# EAGLE board untitled (EAGLE 6.3)
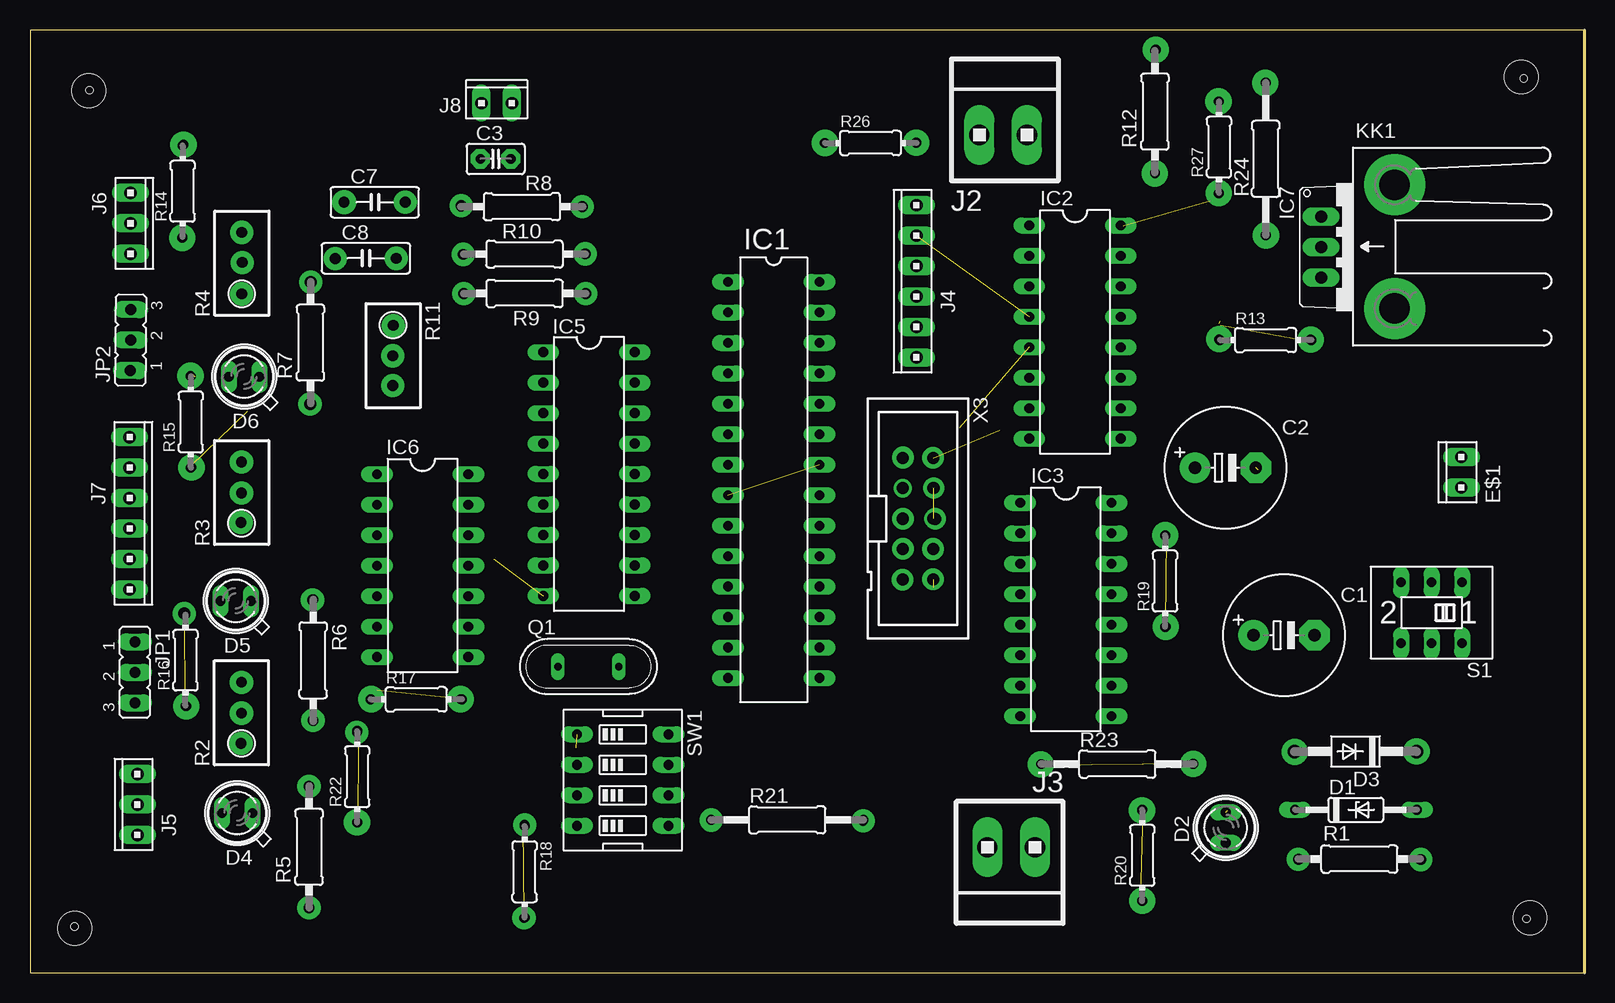
[diagram p0: board, top side]
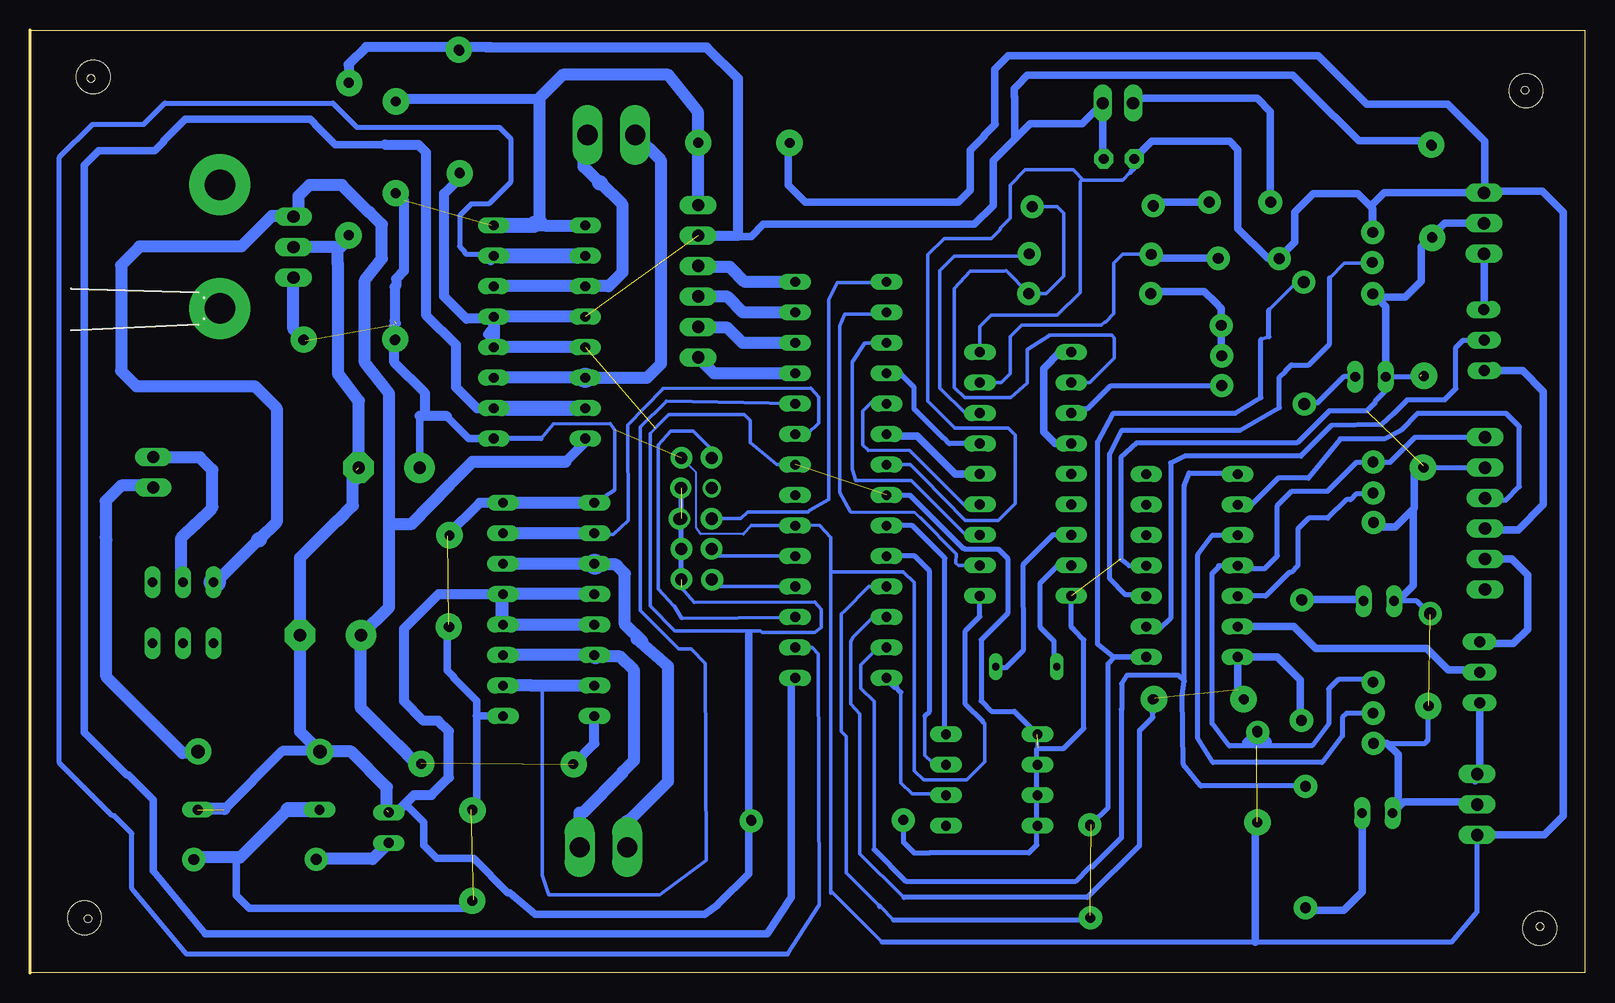
[diagram p1: board, bottom side, seen from below]

Size 129.54 x 78.62 mm. Coordinates in mm from the lower left corner, seen from the top.
Outline: 0,0 129.54,0 129.54,78.62 0,78.62 0,0
Copper layers (1*16): Top 0.035mm / dielectric 1.5mm / Bottom 0.035mm
Design rules "default": minimum track width 10mil, minimum drill 24mil, track to track 8mil, track to pad 8mil, pad to pad 8mil, via to via 8mil, smd to smd 8mil, copper to edge 40mil, drill to drill 8mil, minimum pad ring 10mil, minimum via ring 8mil, stop-mask expansion 4mil, vias tented up to drill 0mil, thermal gap 10mil
Holes 0.6 mm at 4.96,73.61 3.72,3.86 124.71,4.52 124.48,74.58
Holes 2.8 mm at 4.88,73.56 3.74,3.74 125,4.6 124.28,74.71

## Footprints (pad centres in the part's own frame; a part is rotated, then mirrored left to right if it is on the bottom)
E5-10,5 = drill 1.016 pad 2.54: + -2.54,0 | drill 1.016 pad 2.54 octagon: - 2.54,0
C2.5-2 = drill 0.813 pad 1.6 octagon: 1 -1.27,0; 2 1.27,0
C5B2.5 = drill 0.813 pad 1.6 octagon: 1 -2.54,0; 2 2.54,0
DO35Z10 = drill 0.813 long: A 5.08,0; C -5.08,0
SFH482 = drill 0.813 long: A -1.27,0; K 1.27,0
DO41-10 = drill 1.118: A 5.08,0; C -5.08,0
10X02MTA = drill 1.016 long: 1 1.27,0; 2 -1.27,0
DIL28-3 = drill 0.813 long: 1 -16.51,-3.81; 2 -13.97,-3.81; 3 -11.43,-3.81; 4 -8.89,-3.81; 5 -6.35,-3.81; 6 -3.81,-3.81; 7 -1.27,-3.81; 8 1.27,-3.81; 9 3.81,-3.81; 10 6.35,-3.81; 11 8.89,-3.81; 12 11.43,-3.81; 13 13.97,-3.81; 14 16.51,-3.81; 15 16.51,3.81; 16 13.97,3.81; 17 11.43,3.81; 18 8.89,3.81; 19 6.35,3.81; 20 3.81,3.81; 21 1.27,3.81; 22 -1.27,3.81; 23 -3.81,3.81; 24 -6.35,3.81; 25 -8.89,3.81; 26 -11.43,3.81; 27 -13.97,3.81; 28 -16.51,3.81
DIL16 = drill 0.813 long: 1 -8.89,-3.81; 2 -6.35,-3.81; 3 -3.81,-3.81; 4 -1.27,-3.81; 5 1.27,-3.81; 6 3.81,-3.81; 7 6.35,-3.81; 8 8.89,-3.81; 9 8.89,3.81; 10 6.35,3.81; 11 3.81,3.81; 12 1.27,3.81; 13 -1.27,3.81; 14 -3.81,3.81; 15 -6.35,3.81; 16 -8.89,3.81
DIL18 = drill 0.813 long: 1 -10.16,-3.81; 2 -7.62,-3.81; 3 -5.08,-3.81; 4 -2.54,-3.81; 5 0,-3.81; 6 2.54,-3.81; 7 5.08,-3.81; 8 7.62,-3.81; 9 10.16,-3.81; 10 10.16,3.81; 11 7.62,3.81; 12 5.08,3.81; 13 2.54,3.81; 14 0,3.81; 15 -2.54,3.81; 16 -5.08,3.81; 17 -7.62,3.81; 18 -10.16,3.81
DIL14 = drill 0.813 long: 1 -7.62,-3.81; 2 -5.08,-3.81; 3 -2.54,-3.81; 4 0,-3.81; 5 2.54,-3.81; 6 5.08,-3.81; 7 7.62,-3.81; 8 7.62,3.81; 9 5.08,3.81; 10 2.54,3.81; 11 0,3.81; 12 -2.54,3.81; 13 -5.08,3.81; 14 -7.62,3.81
TO220V = drill 1.016 long: 1 -2.54,-2.54; 2 0,-2.54; 3 2.54,-2.54
1X2MTA = drill 1.676 long: 1 1.981,0; 2 -1.981,0
10X06MTA = drill 1.016 long: 1 6.35,0; 2 3.81,0; 3 1.27,0; 4 -1.27,0; 5 -3.81,0; 6 -6.35,0
10X03MTA = drill 1.016 long: 1 2.54,0; 2 0,0; 3 -2.54,0
JP2 = drill 0.914 long: 1 -2.54,0; 2 0,0; 3 2.54,0
581XXXXXXXX = drill 2.54 pad 5.08: A2,5 -5.16,3.45; B2,5 5.16,3.45
QS = drill 0.61 long: 1 -2.54,0; 2 2.54,0
0207/10 = drill 0.813 octagon: 1 -5.08,0; 2 5.08,0
RTRIM3296W = drill 0.61: 1 0,-2.54; 2 0,0; 3 0,2.54
0204/7 = drill 0.813 octagon: 1 -3.81,0; 2 3.81,0
0207/12 = drill 0.813 octagon: 1 -6.35,0; 2 6.35,0
A68-A31 = drill 0.813 long: 1 -2.54,-2.54; 2 0,-2.54; 3 2.54,-2.54; 4 -2.54,2.54; 5 0,2.54; 6 2.54,2.54
EDG-04 = drill 0.813 long: 1 -3.81,-3.81; 2 -1.27,-3.81; 3 1.27,-3.81; 4 3.81,-3.81; 5 3.81,3.81; 6 1.27,3.81; 7 -1.27,3.81; 8 -3.81,3.81
PAK100/2500-10 = drill 1 pad 1.422: 1 -5.08,-1.27; 2 -5.08,1.27; 3 -2.54,-1.27; 4 -2.54,1.27; 5 0,-1.27; 6 0,1.27; 7 2.54,-1.27; 8 2.54,1.27; 9 5.08,-1.27; 10 5.08,1.27

## Placement (x,y rotation side)
C1  [E5-10,5]  104.5,28.17 0 top
C2  [E5-10,5]  99.62,42.13 0 top
C3  [C2.5-2]  38.8,67.88 0 top
C7  [C5B2.5]  28.73,64.27 0 top
C8  [C5B2.5]  27.99,59.6 0 top
D1  ZPD  [DO35Z10]  110.49,13.61 0 top
D2  SFH482  [SFH482]  99.65,12.12 90 top
D3  1N4004  [DO41-10]  110.46,18.46 180 top
D4  SFH482  [SFH482]  17.27,13.33 180 top
D5  SFH482  [SFH482]  17.14,31.01 180 top
D6  SFH482  [SFH482]  17.84,49.72 180 top
E$1  [10X02MTA]  119.28,41.75 90 top
IC1  MEGA8-P  [DIL28-3]  61.97,41.11 270 top
IC2  L293D  [DIL16]  87.08,53.44 270 top
IC3  L293D  [DIL16]  86.32,30.31 270 top
IC5  CM8870CP  [DIL18]  46.58,41.6 270 top
IC6  LM2902N  [DIL14]  32.72,33.96 270 top
IC7  7805TV  [TO220V]  110.13,60.53 270 top
J2  [1X2MTA]  81.1,69.87 0 top
J3  [1X2MTA]  81.77,10.49 180 top
J4  [10X06MTA]  73.87,57.68 90 top
J5  [10X03MTA]  8.95,14.04 90 top
J6  [10X03MTA]  8.38,62.5 270 top
J7  [10X06MTA]  8.3,38.32 270 top
J8  [10X02MTA]  38.89,72.53 0 top
JP1  [JP2]  8.75,25.08 270 top
JP2  [JP2]  8.38,52.77 89.4 top
KK1  TO-220/218-581XXXXXXXX  [581XXXXXXXX]  110.27,60.56 270 top
Q1  [QS]  46.53,25.55 0 top
R1  [0207/10]  110.78,9.5 0 top
R2  [RTRIM3296W]  17.62,21.7 0 top
R3  [RTRIM3296W]  17.63,40.06 0 top
R4  [RTRIM3296W]  17.65,59.17 0 top
R5  [0207/10]  23.25,10.51 90 top
R6  [0207/10]  23.6,26.07 270 top
R7  [0207/10]  23.38,52.56 90 top
R8  [0207/10]  40.99,63.9 180 top
R9  [0207/10]  41.22,56.66 0 top
R10  [0207/10]  41.21,59.93 180 top
R11  [RTRIM3296W]  30.25,51.47 180 top
R12  [0207/10]  93.75,71.82 90 top
R13  [0204/7]  102.97,52.77 0 top
R14  [0204/7]  12.72,65.18 90 top
R15  [0204/7]  13.4,45.94 90 top
R16  [0204/7]  12.95,26.08 90 top
R17  [0204/7]  32.19,22.82 0 top
R18  [0204/7]  41.22,8.44 270 top
R19  [0204/7]  94.6,32.67 90 top
R20  [0204/7]  92.69,9.81 90 top
R21  [0207/12]  63.1,12.77 0 top
R22  [0204/7]  27.27,16.37 90 top
R23  [0207/12]  90.62,17.43 0 top
R24  [0207/12]  102.97,67.88 90 top
R26  [0204/7]  70.05,69.2 0 top
R27  [0204/7]  99.08,68.86 90 top
S1  [A68-A31]  116.8,30.05 180 top
SW1  [EDG-04]  49.4,16.09 270 top
X3  2510-  [PAK100/2500-10]  73.99,37.88 270 top

## Library data of the parts
C1 C2 R1-R7 R11 = resistor
C3 C7 C8 = capacitor-wima
D1 D3 = diode
D2 D4-D6 = led
E$1 J2-J8 = con-amp
IC1 = atmel
IC2 IC3 = st-microelectronics
IC5 = california-micro-devices
IC6 IC7 = linear
JP1 JP2 = jumper
KK1 = heatsink-aavid
Q1 SW1 = special
R8-R10 R12-R24 R26 R27 = rcl
S1 = switch
X3 = con-3m

## Nets
N$1: IC1.16 IC2.2 IC2.15
N$2: IC2.3 IC2.14 J2.1
N$3: IC1.9 SW1.8
N$4: IC1.13 IC6.1 R5.2
N$5: IC2.6 IC2.11 J2.2
N$6: IC1.15 IC2.7 IC2.10
N$7: IC1.23 IC3.2 IC3.15
N$8: IC3.3 IC3.14 J3.1
N$9: IC1.17 X3.1
N$10: D2.A R1.1
N$11: IC3.6 IC3.11 J3.2
N$12: IC1.24 IC3.7 IC3.10
N$13: IC1.1 X3.5
N$14: IC1.19 X3.7
N$15: D4.A R5.1
N$16: IC1.18 X3.9
N$17: IC1.25 J4.6
N$18: IC1.26 J4.5
N$19: IC1.27 J4.4
N$20: IC1.28 J4.3
N$21: C1.+ IC2.8 IC3.8 IC7.1 S1.3
N$23: IC1.10 SW1.7
N$24: IC1.14 SW1.6
N$25: J5.1 JP1.3
N$26: IC6.2 J7.4
N$27: IC6.6 JP1.2
N$28: IC6.9 JP2.2
N$29: IC6.3 R2.2
N$30: IC6.5 R3.2
N$31: IC6.10 R4.2
N$32: IC1.5 IC5.13
N$33: IC5.7 Q1.2
N$34: D5.A R6.1
N$35: D6.A R7.1
N$36: C1.- C2.- C3.2 D1.A D2.K D3.A D4.K D5.K D6.K IC1.8 IC1.22 IC2.4 IC2.5 IC2.12 IC2.13 IC3.4 IC3.5 IC3.12 IC3.13 IC5.9 IC6.11 IC7.2 J4.2 J5.2 J6.2 J7.5 J8.1 R2.1 R3.1 R4.1 SW1.1 SW1.2 SW1.3 X3.4 X3.6 X3.8 X3.10
N$37: IC1.12 IC6.7 R6.2
N$38: IC1.11 IC6.8 R7.2
N$39: IC5.8 Q1.1
N$40: J7.3 JP2.1
N$41: J7.2 JP1.1
N$42: S1.2
N$43: J6.1 JP2.3
N$44: IC5.1 IC5.4
N$45: IC1.2 IC5.11
N$46: IC1.3 IC5.12
N$47: IC1.6 IC5.14
N$48: IC1.4 IC5.15
N$49: R9.1 R11.1 R11.2
N$50: C7.1 J8.2
N$51: C7.2 R8.2
N$52: IC5.2 R8.1 R9.2
N$53: C2.+ C3.1 C8.1 D1.C IC1.7 IC1.20 IC2.1 IC2.9 IC2.16 IC3.1 IC3.9 IC3.16 IC5.10 IC5.18 IC6.4 IC7.3 J4.1 J5.3 J6.3 J7.6 R1.2 R2.3 R3.3 R4.3 X3.2
N$54: IC5.3 R11.3
N$55: C8.2 IC5.17 R10.2
N$56: IC5.16 R10.1
N$57: D3.C
VSS: IC5.6

## Tracks (layer width: path | path; a pad name or v marks a point on that pad's centre or on a via)
N$1
  Bottom 0.305: 66.42,1.58 63.79,5.67 63.84,26.59 64.35,27.13 IC1.16
  Bottom 0.406: 66.42,1.58 116.49,1.58 121.05,7.05 121.05,11.64 122.52,13.11 122.67,13.11 127.09,17.53 127.09,68 124.32,70.77 120.06,70.77 118.3,72.53 104.31,72.53 102.3,70.51 90.43,70.51 89.49,69.57 89.49,65.95 91.33,64.11 92.78,64.11 93.74,63.14 93.74,60.57 93.34,60.17 93.34,60.09 93.18,59.93 91.03,59.93 IC2.15
  Bottom 0.61: 90.67,59.79 91.16,59.3 | IC1.16
  Bottom 1.016: IC2.2 90.67,59.79
  Bottom 1.27: IC2.15 IC2.2
N$2
  Bottom 1.016: IC2.14 IC2.3 81.33,57.25 80.16,58.42 80.16,64.04 82.01,65.89 | 82.07,65.89 83.4,67.22 83.4,69.55
  Bottom 1.27: 82.01,65.89 82.07,65.89 | 83.4,69.55 J2.1
N$3
  Bottom 0.406: IC1.9 56.02,37.3 53.3,34.59 53.3,20 SW1.8
N$4
  Bottom 0.305: IC1.13 58.85,27.14 60.31,25.68 60.31,23.74 59.21,22.64 59.21,10.3
  Bottom 0.406: R5.2 31.97,15.59 33.44,17.4 33.51,23.2 33.34,24.34 | 33.34,24.34 33.34,40.64 32.95,41.7 29.02,41.7 | 59.21,10.3 56.52,7.61 42.46,7.61 41.22,8.85 41.01,8.85 38.6,11.26 38.6,21.92 | 38.6,21.92 38.6,22.02 | 33.34,24.34 33.86,24.82 38.14,24.82 38.57,24.14 38.57,21.94 38.6,21.92
  Bottom 0.61: 29.02,41.7 IC6.1
N$5
  Bottom 1.016: IC2.6 IC2.11 | IC2.6 78.13,49.62 76.96,50.79 76.96,67.71 J2.2
  Bottom 1.676: IC2.6
N$6
  Bottom 0.61: IC1.15 66.12,24.26 66.12,6.32 68.12,3.29 114.95,3.29 119.28,8.53 119.28,14.44 121.35,16.51 121.49,16.51 125.03,20.05 125.03,64.61 125.04,64.62 125.04,67.35 123.82,68.57 119.15,68.57 118.4,69.31 118.4,69.38 116.61,71.18 106.21,71.18 105.43,70.4 | 99.94,69.08 104.11,69.08 105.43,70.4 | 105.43,70.4
  Bottom 0.813: IC2.10 92.31,47.09 94.06,48.85 94.06,52.38 96.55,54.87 96.55,68.43 97.17,69.05 99.92,69.05 99.94,69.08
  Bottom 1.27: IC2.10 IC2.7
N$7
  Bottom 0.254: 76.81,48.71 76.81,48.7
  Bottom 0.305: IC1.23 64.76,44.92 63.81,45.87 63.81,48.01 64.5,48.75 76.81,48.71 | 82.4,36.55 80.93,36.55 79.68,37.72 79.75,45.68 76.81,48.7
  Bottom 0.406: 82.4,36.55 IC3.2
  Bottom 1.016: IC3.2 IC3.15
N$8
  Bottom 1.016: IC3.3 IC3.14 | 79.78,12.56 76.37,15.97 76.37,25.58 78.99,27.84 78.5,27.62 79.97,29.05 79.97,33.28 80.71,34.06 82.45,34.06
  Bottom 1.27: 79.78,11.95 79.78,12.56 | 82.45,34.06 IC3.3
  Bottom 1.676: J3.1 79.78,11.95 | IC3.3 82.44,34.05
N$9
  Bottom 0.254: 75.87,30.62 75.91,30.62 | 72.73,43.64 X3.1
  Bottom 0.305: 72.73,43.64 74.27,45.18 76.15,45.18 77.19,44.01 77.19,32.03 75.91,30.62 | 75.87,30.62 75.24,29.55 65.81,29.65
  Bottom 0.406: IC1.17 65.81,29.65
N$10
  Bottom 1.016: R1.1 100.99,9.5 D2.A
N$11
  Bottom 1.016: IC3.6 IC3.11 | J3.2 83.75,13.37 83.46,13.37 80.15,16.68 80.15,16.77 79.21,17.71 79.21,25.21 80.39,26.39 82.4,26.39
  Bottom 1.27: 82.4,26.39 IC3.6
N$12
  Bottom 0.254: 78.68,44.73 78.68,44.22 78.67,44.22 | 76.53,47.65 76.53,47.68
  Bottom 0.305: 76.53,47.68 IC1.24 | 86.86,23.87 86.86,8.14 86.3,6.53 77.08,6.53 73.2,9.4 73.25,25.82 74.46,27.02 75.48,27.02 78.68,30.22 78.68,44.22 | 76.53,47.65 78.67,45.5 78.67,44.22
  Bottom 0.406: 86.86,23.87 87.75,23.96
  Bottom 1.016: IC3.7 87.75,23.96 IC3.10
N$13
  Bottom 0.254: 64.7,38.46 64.62,38.54
  Bottom 0.305: 64.62,38.54 63,39.47 63,56.13 62.26,57.56 58.22,57.56 | X3.5 70.31,37.88 69.73,38.46 64.7,38.46
  Bottom 0.406: IC1.1 58.22,57.56
N$14
  Bottom 0.305: IC1.19 72.37,34.76 X3.7
  Bottom 0.406: IC1.19 66.19,35.16
N$15
  Bottom 0.61: D4.A 18.54,6.75 20.05,5.24 23.06,5.24 R5.1
N$16
  Bottom 0.305: IC1.18 72.43,32.24 X3.9
  Bottom 0.406: IC1.18 66.19,32.62
N$17
  Bottom 1.016: IC1.25 72.54,50 J4.6
N$18
  Bottom 1.016: IC1.26 70.17,52.54 71.44,53.81 73.81,53.81 J4.5
N$19
  Bottom 1.016: IC1.27 70.11,55.08 71.41,56.38 73.84,56.38 J4.4
N$20
  Bottom 1.016: IC1.28 69.97,57.62 71.21,58.86 73.78,58.86 J4.3
N$21  (1 unrouted)
  Bottom 0.813: IC2.8 83.28,44.27 84.92,42.63 | 94.58,40.7 94.29,41.01 | 99.59,37.66 99.55,37.43 | IC3.8 82.51,19.14 84.28,17.37 | 98.92,19.05 | 97.34,17.47 96.93,17.47
  Bottom 1.016: 110.49,36.13 114.03,32.59 | 110.44,36.13 109,37.57 109,47.1 110.82,48.92 120.67,48.92 121.96,50.2 121.96,59.01 120.4,60.57 111.93,60.57 109.39,63.11 107.9,63.11 107.81,63.21 107.81,63.28 IC7.1 107.17,63.48 107.17,64.79 106.27,65.69 103.56,65.69 101.33,63.46 101.26,63.46 100.22,62.41 100.22,59.58 101.64,57.76 101.64,50.89 99.61,48.29 99.59,37.66 99.61,33.21 99.61,30.52 C1.+ 101.96,22.09 98.92,19.05 | 84.92,42.63 92.67,42.63 94.29,41.01 | 94.58,40.7 97.73,37.45 99.55,37.43 | 97.34,17.47 98.92,19.05
  Bottom 1.27: 110.44,36.13 110.49,36.13
  Bottom 1.676: 114.03,32.59 S1.3
N$23
  Bottom 0.305: 54.96,21.43 54.96,18.14 54.4,17.58 53.43,17.58 SW1.7
  Bottom 0.406: IC1.10 55.83,34.76 54.58,33.51 54.58,21.81 54.96,21.43
N$24
  Bottom 0.305: 56.98,23.42 56.98,15.87 56.04,14.93 53.32,14.93 SW1.6
  Bottom 0.406: 56.98,23.42 57.46,23.9
  Bottom 0.61: 57.46,23.9 IC1.14
N$25
  Bottom 0.61: JP1.3 8.75,16.34 9.09,16 9.09,16.44 J5.1
N$26
  Bottom 0.406: IC6.2 27.75,39.04 25.54,41.25 23.02,41.25 20.37,44.53 16.67,44.54 15.33,45.24 13.92,46.65 6.53,46.65 5.42,45.54 5.42,40.56 6.57,39.41 8.12,39.41 J7.4
N$27
  Bottom 0.61: IC6.6 24.24,28.88 22.41,27.05 13.13,27.05 11.35,25.27 8.94,25.27 JP1.2
N$28
  Bottom 0.406: IC6.9 36.34,28.69 35.38,28.69 34.49,29.58 34.49,42.52 33.33,43.1 23.65,43.1 21.13,45.64 16.9,45.71 15.93,46.62 14.78,47.77 11.68,47.77 10.73,48.72 10.73,52.15 10.11,52.77 JP2.2
N$29
  Bottom 0.406: IC6.3 31.01,36.5 32.23,34.88 32.23,19.56 30.98,17.56 21.87,17.55 20.18,19.76 20.18,21.3 19.83,21.65 17.67,21.65
  Bottom 0.61: R2.2 17.67,21.65
N$30
  Bottom 0.406: IC6.5 26.58,31.42 24.59,33.41 24.46,33.41 23.88,33.99 23.88,37.02 22.98,37.92 21.38,37.92 19.83,39.47 19.5,39.47 19.05,39.92 17.77,39.92
  Bottom 0.61: R3.2 17.77,39.92
N$31
  Bottom 0.305: R4.2 20.03,59.17 21.25,57.95
  Bottom 0.406: IC6.10 36.63,31.53 38.25,31.53 39.57,32.91 39.57,43.28 38.56,45.27 28.69,45.27 25.42,47.14 25.42,49.68 24.9,50.2 24.9,50.21 24.42,50.69 23,50.69 21.25,52.44 21.25,57.95
N$32
  Bottom 0.254: 56.23,43.55 59.71,43.55 59.71,43.61 | IC1.5 58.19,47.43
  Bottom 0.305: 56.23,43.55 51.65,38.97 50.48,38.97 IC5.13 | 59.71,43.61 60.13,44.03 60.13,46.86 59.35,47.64 58.34,47.64
  Bottom 0.406: 58.34,47.64 IC1.5
N$33
  Bottom 0.406: IC5.7 44.3,36.52 46.19,34.64 46.22,34.62 46.77,34.06 46.74,26.94 48.23,25.45 48.96,25.45 Q1.2
N$34
  Bottom 0.61: R6.1 18.55,31.15 D5.A
N$35
  Bottom 0.406: D6.A 20.06,49.72 22.22,47.56 23.29,47.56 R7.1
N$36  (13 unrouted)
  Bottom 0.254: IC5.9 42.77,28.85 41.74,27.82 41.74,20.39 43.37,18.76 45.52,18.76 | 72.23,5.69 72.17,5.77 | 69.53,44.23 | 77.43,45.44 77.43,45.4 77.87,44.96 | 75.27,32.14 75.26,32.14 | 68.67,28.53 68.52,28.38 | X3.6 X3.8 X3.10
  Bottom 0.305: 75.27,32.14 74.17,30.91 64.13,30.95 63.62,30.31 63.62,28.82 64.13,28.38 68.52,28.38 | IC1.22 67.33,42.38 69.53,44.23 69.53,46.06 70.04,46.57 76.31,46.57 77.43,45.44 | 77.87,44.96 77.87,30.61 75.8,28.53 69.37,28.53 | 69.37,28.53 68.67,28.53 | 69.66,28.24 69.37,28.53 | SW1.3 SW1.2 SW1.1
  Bottom 0.406: 13.71,49.72 D6.K 16.56,49.7 16.56,48.56 17.47,47.64 17.47,47.52 18.14,46.86 21.29,46.86 23.95,44.2 37.31,44.2 38.63,43 38.63,34.53 37.95,33.96 IC6.11 | 16.46,19.16 13.29,19.16 13.19,19.26 13.19,19.27 13.03,19.43 13.03,22.24 12.96,22.3 | D5.K 13.97,31.01 12.85,29.89 | 99.11,13.27 99.21,13.27 99.81,13.87 | IC5.9 42.77,28.84 42.54,28.61 41.72,27.79 41.72,20.42 42.23,19.9 43.41,18.72 45.63,18.72 45.63,10.67 46.3,10 54.59,10 | J7.5 13.26,42.13 13.41,42.28 | 89.56,6.7 89.72,6.7 | IC1.8 56.23,39.84 51.82,35.43 51.73,35.43 51.65,35.34 48.84,35.34 48.08,34.58 48.08,29.98 50.29,27.77 50.29,22.67 49.44,21.82 47.51,21.82 SW1.1
  Bottom 0.61: J6.2 11.63,62.5 13.59,60.54 13.59,57.7 14.94,56.35 17.37,56.35 R4.1 16.57,55.56 D6.K 16.8,49.72 | J5.2 9.26,14.04 9.48,14.26 15.07,14.26 D4.K 15.52,13.81 15.52,18.22 16.46,19.16 R2.1 17.98,19.16 18.01,19.13 | 14.27,38.69 15.77,37.19 17.3,37.19 R3.1 | D5.K 15.58,31.01 14.27,32.32 14.27,38.69 | 14.27,38.69 14.18,38.78 14.18,41.57 14.12,41.57 13.41,42.28 | 72.17,5.77 69.66,8.27 69.66,28.24 | 72.23,5.69 73.31,4.89 87.46,4.89 89.56,6.7 | J4.2 73.79,61.42 69.44,61.42 68.44,62.42 50.87,62.42 49.29,63.99 49.29,67.71 46.2,70.81 41.86,70.81 41.86,70.83 J8.1 40.15,72.52 40.15,67.96 C3.2 | 13.59,49.84 13.46,49.84 13.45,49.84 | 89.72,6.7 92.58,9.57 95.65,9.57 96.75,10.66 96.75,12.57 98.28,14.1
  Bottom 0.813: 90.33,29.07 90.33,31.52 90.27,31.58 IC3.4 95.5,31.58 98.37,28.72 98.37,22.65 96.76,21.04 95.52,21.04 94.65,20.17 94.65,16.3 96.1,14.85 97.54,14.85 98.28,14.1 99.11,13.27 | 113.41,13.61 108.5,18.51 105.43,18.51 D3.A | J4.2 70.57,61.49 70.54,61.47 70.54,74.57 73.13,77.16 91.52,77.16
  Bottom 1.016: 99.81,13.55 99.81,13.87 99.81,15.48 102.79,18.46 D3.A 107.04,20.12 C1.- 107.04,34.63 104.01,37.66 103.95,37.66 102.64,38.96 102.64,41.25 102.36,41.53 | IC2.4 IC2.13 IC2.12 IC2.5 | IC3.4 IC3.13 IC3.12 IC3.5 | 102.14,41.75 102.14,47.7 103.88,49.97 103.88,59.12 103.91,59.15 103.91,60.27 103.03,61.16 103.03,61.43 103.93,60.53 IC7.2
  Bottom 1.676: 102.14,41.75 102.36,41.53 102.36,41.93
N$37  (1 unrouted)
  Bottom 0.305: 58.85,29.68 | 59.27,29.68 60.86,28.09 60.99,27.96 61.15,27.61 61.15,22.44 60.38,21.61 60.38,9.95 56.73,6.3
  Bottom 0.406: 59.27,29.68 IC1.12 | 56.73,6.3 41.42,6.3 37.08,10.64 37.08,20.23 35.98,21.33 35.98,21.86
  Bottom 0.61: R6.2 23.7,21.09 23.7,24.45 25.59,26.34 IC6.7 28.91,23.6 28.3,23 | IC1.12 58.85,29.68 | 35.98,21.86 35.98,22.73 35.83,22.88
N$38  (1 unrouted)
  Bottom 0.254: 61.71,30.15 61.69,30.16 | 61.88,29.98 61.89,29.98 61.94,29.93 | 61.96,21.36 61.94,21.44 | 61.54,19.74 61.61,19.81
  Bottom 0.305: IC1.11 59.63,32.22 61.69,30.16 | 61.88,29.98 61.71,30.15 | 61.94,21.44 61.94,29.93 | 58.74,5.54 61.54,8.34 61.54,19.74 61.95,20.16 61.96,21.36 | 57.57,4.41 58.7,5.54 | 26.3,55.27 23.94,57.64 | 26.98,52.82 26.3,53.05
  Bottom 0.406: 26.98,52.82 26.98,47.96 29.1,46.69 39.27,46.69 40.58,44.28 40.58,27.41 39.26,26.37 36.55,26.37 | 58.7,5.54 58.74,5.54 | IC6.8 39.15,26.34 39.71,25.78 39.71,13.78 41.09,12.4 | 57.57,4.41 41.56,4.41 41.17,4.8 | 23.94,57.64 R7.2 | 26.3,53.05 26.3,55.27
  Bottom 0.61: IC6.8 36.55,26.37
N$39
  Bottom 0.406: IC5.8 43.91,33.98 45.35,32.54 45.35,28.82 44.19,27.66 44.19,25.75 Q1.1
N$40
  Bottom 0.61: JP2.1 5.17,50.23 3.42,48.48 3.42,39.05 5.53,36.94 8.19,36.94 J7.3
N$41
  Bottom 0.61: J7.2 6.08,34.51 4.74,33.17 4.74,28.66 5.93,27.47 8.6,27.47 JP1.1
N$42
  Bottom 1.016: 116.95,35.68 116.95,32.74 S1.2
N$43
  Bottom 0.61: J6.1 8.38,55.34 JP2.3
N$44
  Bottom 0.61: IC5.1 43.72,51.76 45.07,50.41 45.07,45.09 44.75,44.77 44.72,44.77 44.11,44.16 42.79,44.16 IC5.4
N$45
  Bottom 0.254: IC1.2 58.32,54.92 | 52.17,33.98 52.39,34.2 | 55.32,37.93 55.36,37.95 55.82,38.42 61.12,38.42 61.18,38.48
  Bottom 0.305: 61.18,38.48 62.06,40.06 62.06,53.95 61.65,54.92 58.32,54.92 | IC5.11 52.17,33.98 | 55.32,37.93 52.35,34.96 52.39,34.2
N$46
  Bottom 0.254: 57.54,52.52 IC1.3 | 51.48,36.52 51.58,36.52
  Bottom 0.305: IC5.12 51.48,36.52 | 57.54,52.52 59.98,52.52 61.02,50.93 61.02,42 60.72,41.05 56.11,41.05 51.58,36.52
N$47
  Bottom 0.61: IC5.14 52.42,41.6 55.6,44.78 58.02,44.78 IC1.6
N$48
  Bottom 0.406: IC5.15 52.92,44.14 53.36,44.58 53.43,44.58 55.88,47.03 55.88,48.83 57.1,50.05 58.11,50.05 IC1.4
N$49
  Bottom 0.61: R11.2 R11.1 30.25,55.42 30.72,55.88 30.75,55.88 31.68,56.82 35.98,56.82 R9.1
N$50
  Bottom 0.61: C7.1 26.19,71.82 27.29,72.92 37.23,72.92 J8.2
N$51
  Bottom 0.61: C7.2 35.54,64.27 R8.2
N$52
  Bottom 0.254: 48.18,58.54 48.36,58.52 | 44.59,53.17 44.6,53.16
  Bottom 0.305: IC5.2 41.23,49.22 39.18,51.27 39.18,52.94 39.41,53.17 44.59,53.17 | 44.6,53.16 46.44,52 46.44,49.2 47.8,47.98 51.66,47.98 52.52,48.83 52.52,57.06 51.21,58.52 48.36,58.52 | 48.18,58.54 R9.2 46.28,56.64 44.87,56.64 43.41,58.1 43.41,63.34 43.96,63.9 R8.1
N$53  (7 unrouted)
  Bottom 0.178: 70.11,36.6 73.65,36.6 74.03,37.15 74.03,41.74 X3.2
  Bottom 0.254: 63.72,37.3 IC1.20 | 62.83,33.34 62.72,33.46 | 55.2,41.39 55.29,41.49 | 53.62,46.58 | 69.42,37.3 70.11,36.6
  Bottom 0.305: 63.72,37.3 62.83,36.3 62.83,33.34 62.83,6.87 | IC3.1 80.81,40.27 80.81,45.29 81.19,45.81 85.95,45.75 86.96,44.55 | 62.72,33.46 56.78,33.46 55.85,32.57 55.85,16.85 55.08,16.09 51.48,16.09 49.98,17.58 49.98,20.8 50.11,20.93 | IC1.7 56.18,42.38 55.29,41.49 | 55.2,41.39 51.63,37.72 48.85,37.72 47.44,39.14 47.44,44.85 48.01,45.42 52.46,45.42 53.62,46.58 | 53.62,46.58 54.72,47.68 54.72,59.89 53.35,61.25 49.43,61.25 48.69,61.98 48.69,62.09 47.86,62.92 47.86,65.7 46.6,66.96 42.63,66.96 41.77,66.11 | IC5.18 50.39,53.89 49.43,54.86 43.93,54.86 42.04,56.74 42.04,65.99 41.92,66.11 41.77,66.11 | IC1.20 69.42,37.3 | 62.83,6.87 62.83,6.64 | 58.53,2.57 62.83,6.87 | 37.84,66.75 | 37.84,66.75 38.48,66.11 41.77,66.11
  Bottom 0.406: 28.66,33.72 26.66,33.72 25.6,34.78 25.6,38.96 24.38,40.18 21.4,40.18 18.98,42.6 R3.3 16.18,42.6 14.11,44.67 J7.6 | IC6.4 30.49,33.96 30.49,33.84 31.03,33.3 31.03,20.79 29.6,18.93 27.37,18.93 | 27.37,18.93 22.7,18.94 21.32,20.75 21.32,23.67 20.52,24.47 17.84,24.47 | J5.3 8.95,5.13 11.09,2.57 27.45,2.57 58.53,2.57 | J5.3 | 27.37,18.93 27.37,19.93 27.18,20.12 27.18,19.36 27.12,19.3 27.12,20.13 27.21,20.22 27.23,20.22 27.38,20.07 | 86.96,44.55 92.99,44.55 | IC5.10 50.39,29.71 51.6,28.51 51.6,22.41 50.11,20.93 | D1.C 107.97,13.61 112.35,9.22 | 94.78,28.68 94.59,28.87 | 94.59,28.87 94.72,28.87 94.72,28.99 94.65,29.05 94.65,28.99 94.53,28.87 94.59,28.87 | 92.3,14.14 92.78,13.66 | 93.28,5.41 92.58,6.11 | C3.1 37.53,67.06 37.84,66.75
  Bottom 0.61: IC6.4 28.66,33.72 | 17.84,24.47 R2.3 17.62,24.22 17.59,24.19 | J5.3 3.38,11.5 1.77,13.11 1.77,63.44 3.53,65.2 8.22,65.2 J6.3 16.71,65.04 17.69,64.06 17.69,61.75 R4.3 17.65,63.73 18.89,64.97 22.59,64.97 24.13,63.43 24.13,60.92 C8.1 26.41,59.6 28.88,62.07 28.88,68.65 29.57,69.34 36.07,69.34 C3.1 | IC2.9 92.99,44.55 94.78,46.34 94.78,46.43 | IC3.1 82.51,39.16 82.8,38.87 | 92.3,21.42 IC3.9 | 97.08,46.47 C2.+ | 112.35,9.22 112.35,6.5 111.26,5.41 93.28,5.41 | 92.3,21.42 92.35,21.42 | 27.45,2.57 27.45,12.46 27.32,12.6 | 92.3,21.42 92.3,22.7 94.22,24.62 94.22,24.68 94.78,25.24 94.78,28.68 | 92.3,14.14 92.3,21.42
  Bottom 0.813: 99.15,54.36 99.15,57.22 99.03,57.26 99.03,57.87 98.36,58.54 98.36,64.41 99.01,65.05 | 99.06,54.15 99.18,54.03 99.18,50.91 96.62,48.35 96.62,46.65 96.84,46.43 | 94.78,46.43 96.84,46.43 | 96.84,46.43 97.04,46.43 97.08,46.47 | IC2.16 91.09,62.33 | IC3.16 92.07,39.2 94.84,36.43 94.72,36.43 94.47,36.68 | 99.28,72.84 87.11,72.84 87.1,72.84
  Bottom 1.016: 108.06,13.61 112.04,9.63 115.73,9.63 | IC3.1 IC3.16 | 86.63,62.33 IC2.1 | 86.63,62.33 87.54,62.33 | J4.1 73.87,71.76 76.34,74.88 85.16,74.88 87.1,72.94 87.1,72.84 87.1,62.8 86.63,62.33 | IC7.3 107.59,53.68 106.62,52.7
  Bottom 1.27: D1.C 108.06,13.61 | 115.73,9.63 R1.2 | IC2.16 87.54,62.33 87.55,62.49
N$54
  Bottom 0.406: R11.3 39.53,48.93 41.44,47.02 42.43,47.02 IC5.3
N$55
  Bottom 0.305: 37.02,59.93 38.49,59.93 39.22,59.2 39.22,54.96 39.9,54.28 40,54.28 40.26,54.02 46.91,54.02 47.86,53.07 47.86,49.98 48.59,49.25 50.37,49.25 IC5.17
  Bottom 0.406: R10.2 37.02,59.93
  Bottom 0.61: C8.2 35.79,59.6 R10.2
N$56
  Bottom 0.254: R10.1 46.44,59.78
  Bottom 0.305: IC5.16 51.63,46.68 53.72,48.78 53.72,58.58 52.52,59.78 46.44,59.78
N$57
  Bottom 1.016: 123.19,36.13 123.19,24.7 116.84,18.35 115.66,18.35
  Bottom 1.676: D3.C 115.66,18.35
N$68  (via drill 0.8 pad 2.18)
  other vias: 105.38,18.43
N$69  (via drill 0.8 pad 2.18)
  other vias: 115.53,18.49
N$72  (via drill 0.9 pad 1.93)
  other vias: 17.65,61.75
N$73  (via drill 0.9 pad 1.93)
  other vias: 17.68,59.24
N$74  (via drill 0.9 pad 1.93)
  other vias: 17.65,56.63
N$75  (via drill 0.9 pad 1.93)
  other vias: 30.27,53.99
N$76  (via drill 0.9 pad 1.93)
  other vias: 30.24,51.45
N$77  (via drill 0.9 pad 1.93)
  other vias: 30.24,48.97
N$81  (via drill 0.9 pad 1.93)
  other vias: 17.59,37.55
N$82  (via drill 0.9 pad 1.93)
  other vias: 17.62,40.03
N$83  (via drill 0.9 pad 1.93)
  other vias: 17.62,42.61
N$86  (via drill 0.9 pad 1.93)
  other vias: 17.62,24.24
N$87  (via drill 0.9 pad 1.93)
  other vias: 17.62,21.67
N$88  (via drill 0.9 pad 1.93)
  other vias: 17.59,19.15
N$92  (via drill 0.9 pad 1.93)
  other vias: 35.93,63.97
N$93  (via drill 0.9 pad 1.93)
  other vias: 36.1,59.91
N$94  (via drill 0.9 pad 1.93)
  other vias: 36.15,56.64
N$95  (via drill 0.9 pad 1.93)
  other vias: 46.3,56.66
N$96  (via drill 0.9 pad 1.93)
  other vias: 46.28,59.95
N$97  (via drill 0.9 pad 1.93)
  other vias: 46.03,63.89
N$98  (via drill 0.9 pad 1.93)
  other vias: 105.7,9.47
N$99  (via drill 0.9 pad 1.93)
  other vias: 115.89,9.46
N$100  (via drill 0.9 pad 1.93)
  other vias: 26.16,64.26
N$101  (via drill 0.9 pad 1.93)
  other vias: 31.28,64.26
N$102  (via drill 0.9 pad 1.93)
  other vias: 30.52,59.58
N$103  (via drill 0.9 pad 1.93)
  other vias: 25.44,59.56
N$104  (via drill 0.9 pad 1.93)
  other vias: 23.54,31.11
N$105  (via drill 0.9 pad 1.93)
  other vias: 23.59,21.06
N$106  (via drill 0.9 pad 1.93)
  other vias: 23.25,15.57
N$107  (via drill 0.9 pad 1.93)
  other vias: 23.25,5.44
N$118  (via drill 0.8 pad 1.93)
  other vias: 27.24,20.06
N$120
  Bottom 0.406: 27.12,20.17 26.25,19.3 26.62,19.3 27.1,19.78 27.1,19.36 26.83,19.09
N$121
  Bottom 0.406: 27.3,20.29 28.33,19.26 28.1,19.26 28.09,19.27 27.83,19.27 27.78,19.32 27.77,19.32 27.67,19.42 27.67,19.45 27.62,19.5 27.62,19.56
N$122  (via drill 0.8 pad 1.93)
  other vias: 41.22,12.36
N$123  (via drill 0.8 pad 1.93)
  other vias: 41.17,4.59
N$124
  Bottom 0.406: 41.19,4.76 41.19,4.69 41.03,4.53 41.03,4.6 40.96,4.67 40.96,4.49 41.01,4.44 41.14,4.44 41.28,4.3
N$125
  Bottom 0.406: 41.17,12.62 41.22,12.62 41.38,12.46 41.38,12.32 41.45,12.25 41.33,12.25 41.26,12.18 41.08,12.18 41.08,12.29 40.98,12.39
N$140  (via drill 1 pad 1.93)
  other vias: 23.34,47.43
N$141  (via drill 1 pad 1.93)
  other vias: 23.39,57.61
N$144  (via drill 1 pad 1.93)
  other vias: 12.85,29.96
N$147  (via drill 0.8 pad 2)
  other vias: 26.18,64.27
N$151  (via drill 0.8 pad 2.18)
  other vias: 84.24,17.41
N$152  (via drill 0.8 pad 2.18)
  other vias: 96.94,17.44
N$154  (via drill 0.8 pad 2.18)
  other vias: 99.06,65.01
N$158
  Bottom 0.61: 47.47,69.53 47.47,69.76 47.49,69.77 47.49,73.02 47.51,73.05 47.51,73.74 47.34,73.92 47.34,73.95 46.44,74.84 24.31,74.84 20.86,71.39 20.83,71.39 18.82,69.38 13.22,69.38 12.93,69.09 12.64,69.09
N$160  (via drill 0.8 pad 2.18)
  other vias: 12.69,61.3
N$164  (via drill 0.8 pad 2.18)
  other vias: 92.69,6.02
N$170  (via drill 0.8 pad 2.18)
  other vias: 99.05,72.67
N$171  (via drill 0.8 pad 2.18)
  other vias: 93.73,66.66
N$172  (via drill 0.8 pad 2.18)
  other vias: 93.81,76.98
N$173
  Bottom 0.813: 91.09,53.55 91.38,53.26
N$175  (via drill 0.8 pad 2.18)
  other vias: 102.95,74.21
N$176
  Bottom 0.813: 91.14,77.2 101.54,77.2 102.98,75.76 102.98,74.14 103.05,74.08
N$181  (via drill 0.8 pad 1.8)
  other vias: 72.74,42.98
N$182  (via drill 0.8 pad 1.8)
  other vias: 75.26,42.95
N$185  (via drill 0.8 pad 2.18)
  other vias: 99.1,52.85
N$186  (via drill 0.8 pad 2.18)
  other vias: 106.72,52.81
N$187  (via drill 0.8 pad 1.8)
  other vias: 75.26,35.35
N$188  (via drill 0.8 pad 2.18)
  other vias: 12.78,69.06
N$189  (via drill 0.8 pad 1.8)
  other vias: 72.69,32.78
N$190  (via drill 0.8 pad 1.8)
  other vias: 75.26,32.83
N$197  (via drill 0.8 pad 2.18)
  other vias: 73.86,69.23
N$199
  Bottom 0.406: 12.69,29.96 12.91,29.96 | 12.69,29.96 12.69,29.85 | 12.69,29.96 12.69,30.02 13.13,30.02 13.13,30.07 13.24,30.07 13.24,29.74 13.19,29.74 | 13.19,29.74 12.86,29.74 12.86,29.52 12.58,29.52 12.58,29.79 12.69,29.79 12.69,30.18 13.02,30.18 13.02,30.29 13.19,30.29 13.19,29.74
N$202
  Bottom 0.406: 12.69,61.4 12.86,61.4 12.86,60.96 12.97,60.96 12.97,61.34
N$204  (via drill 0.8 pad 2.18)
  other vias: 103,61.5
N$205  (via drill 0.8 pad 2.18)
  other vias: 66.25,69.21
N$212
  Bottom 0.406: 75.28,37.98 75.3,37.98 | 75.28,37.98 75.28,40.38 | 75.28,37.98 75.28,32.35 75.28,37.98
N$213  (via drill 0.8 pad 2.18)
  other vias: 13.37,49.8
N$214  (via drill 0.8 pad 2.18)
  other vias: 13.45,42.16
N$215  (via drill 0.8 pad 2.18)
  other vias: 13.03,22.25
N$216  (via drill 0.8 pad 2.18)
  other vias: 27.25,12.55
N$217  (via drill 0.8 pad 2.18)
  other vias: 35.87,22.83
N$218  (via drill 0.8 pad 2.18)
  other vias: 28.43,22.83
N$219  (via drill 0.8 pad 2.18)
  other vias: 94.65,28.87
N$220  (via drill 0.8 pad 2.18)
  other vias: 94.59,36.49
N$221  (via drill 0.8 pad 2.18)
  other vias: 92.66,13.56
N$228
  Bottom 0.813: 93.66,66.76 93.66,66.36 95.03,64.99 95.03,56.4 93.66,55.03 93.18,54.55 91.25,54.55
N$229
  Bottom 0.61: 66.35,69.1 66.35,65.68 64.93,64.27 52.21,64.27 51.19,65.29 51.19,68.59 50.01,69.77 50.01,69.85 49.1,70.75
N$230
  Bottom 0.61: 49.14,70.87 49.14,75.36 48.04,76.46 22.18,76.46 18.16,72.44 11.4,72.44 8.34,69.37 8.34,65.2 8.26,65.12
N$231  (via drill 0.8 pad 1.93)
  other vias: 56.78,12.75
N$232  (via drill 0.8 pad 1.93)
  other vias: 69.43,12.68
N$233
  Bottom 0.406: 54.59,10.01 55.88,10.01 56.75,10.88 56.75,12.68
S$1
  Bottom 1.016: 116.96,35.83 116.96,36.21 115.73,37.44 115.72,37.44 114.37,38.78
S$2
  Bottom 1.016: 114.35,38.88 114.35,41.94 115.39,42.99 119.27,42.99 119.29,43.01
S$3
  Bottom 1.016: 123.23,36.35 123.23,39.35 121.95,40.63 119.38,40.63 119.27,40.53 119.31,40.53 119.45,40.39
S$4
  Bottom 1.016: 113.36,13.67 115.57,13.67 115.63,13.61
S$5  (via drill 1 pad 1.78)
  other vias: 72.74,35.36
S$6  (via drill 1 pad 1.78)
  other vias: 72.74,37.87
S$7  (via drill 1 pad 1.78)
  other vias: 75.31,40.44
S$8  (via drill 1 pad 1.78)
  other vias: 75.44,37.87